# Altium PCB SLT_4U_V100.PcbDoc (part 6 of 6)
Units mm, origin at the board's own origin, x right, y up, seen from the top; angles counter-clockwise.
Board outline 180 x 80 mm, 5 copper layers (Top Layer, Mid-Layer 1, Mid-Layer 2, Mid-Layer 4, Bottom Layer); 1167 components, 840 nets, 3922 pads, 254 vias.
Unrouted connection lines stored in the file: 1943.
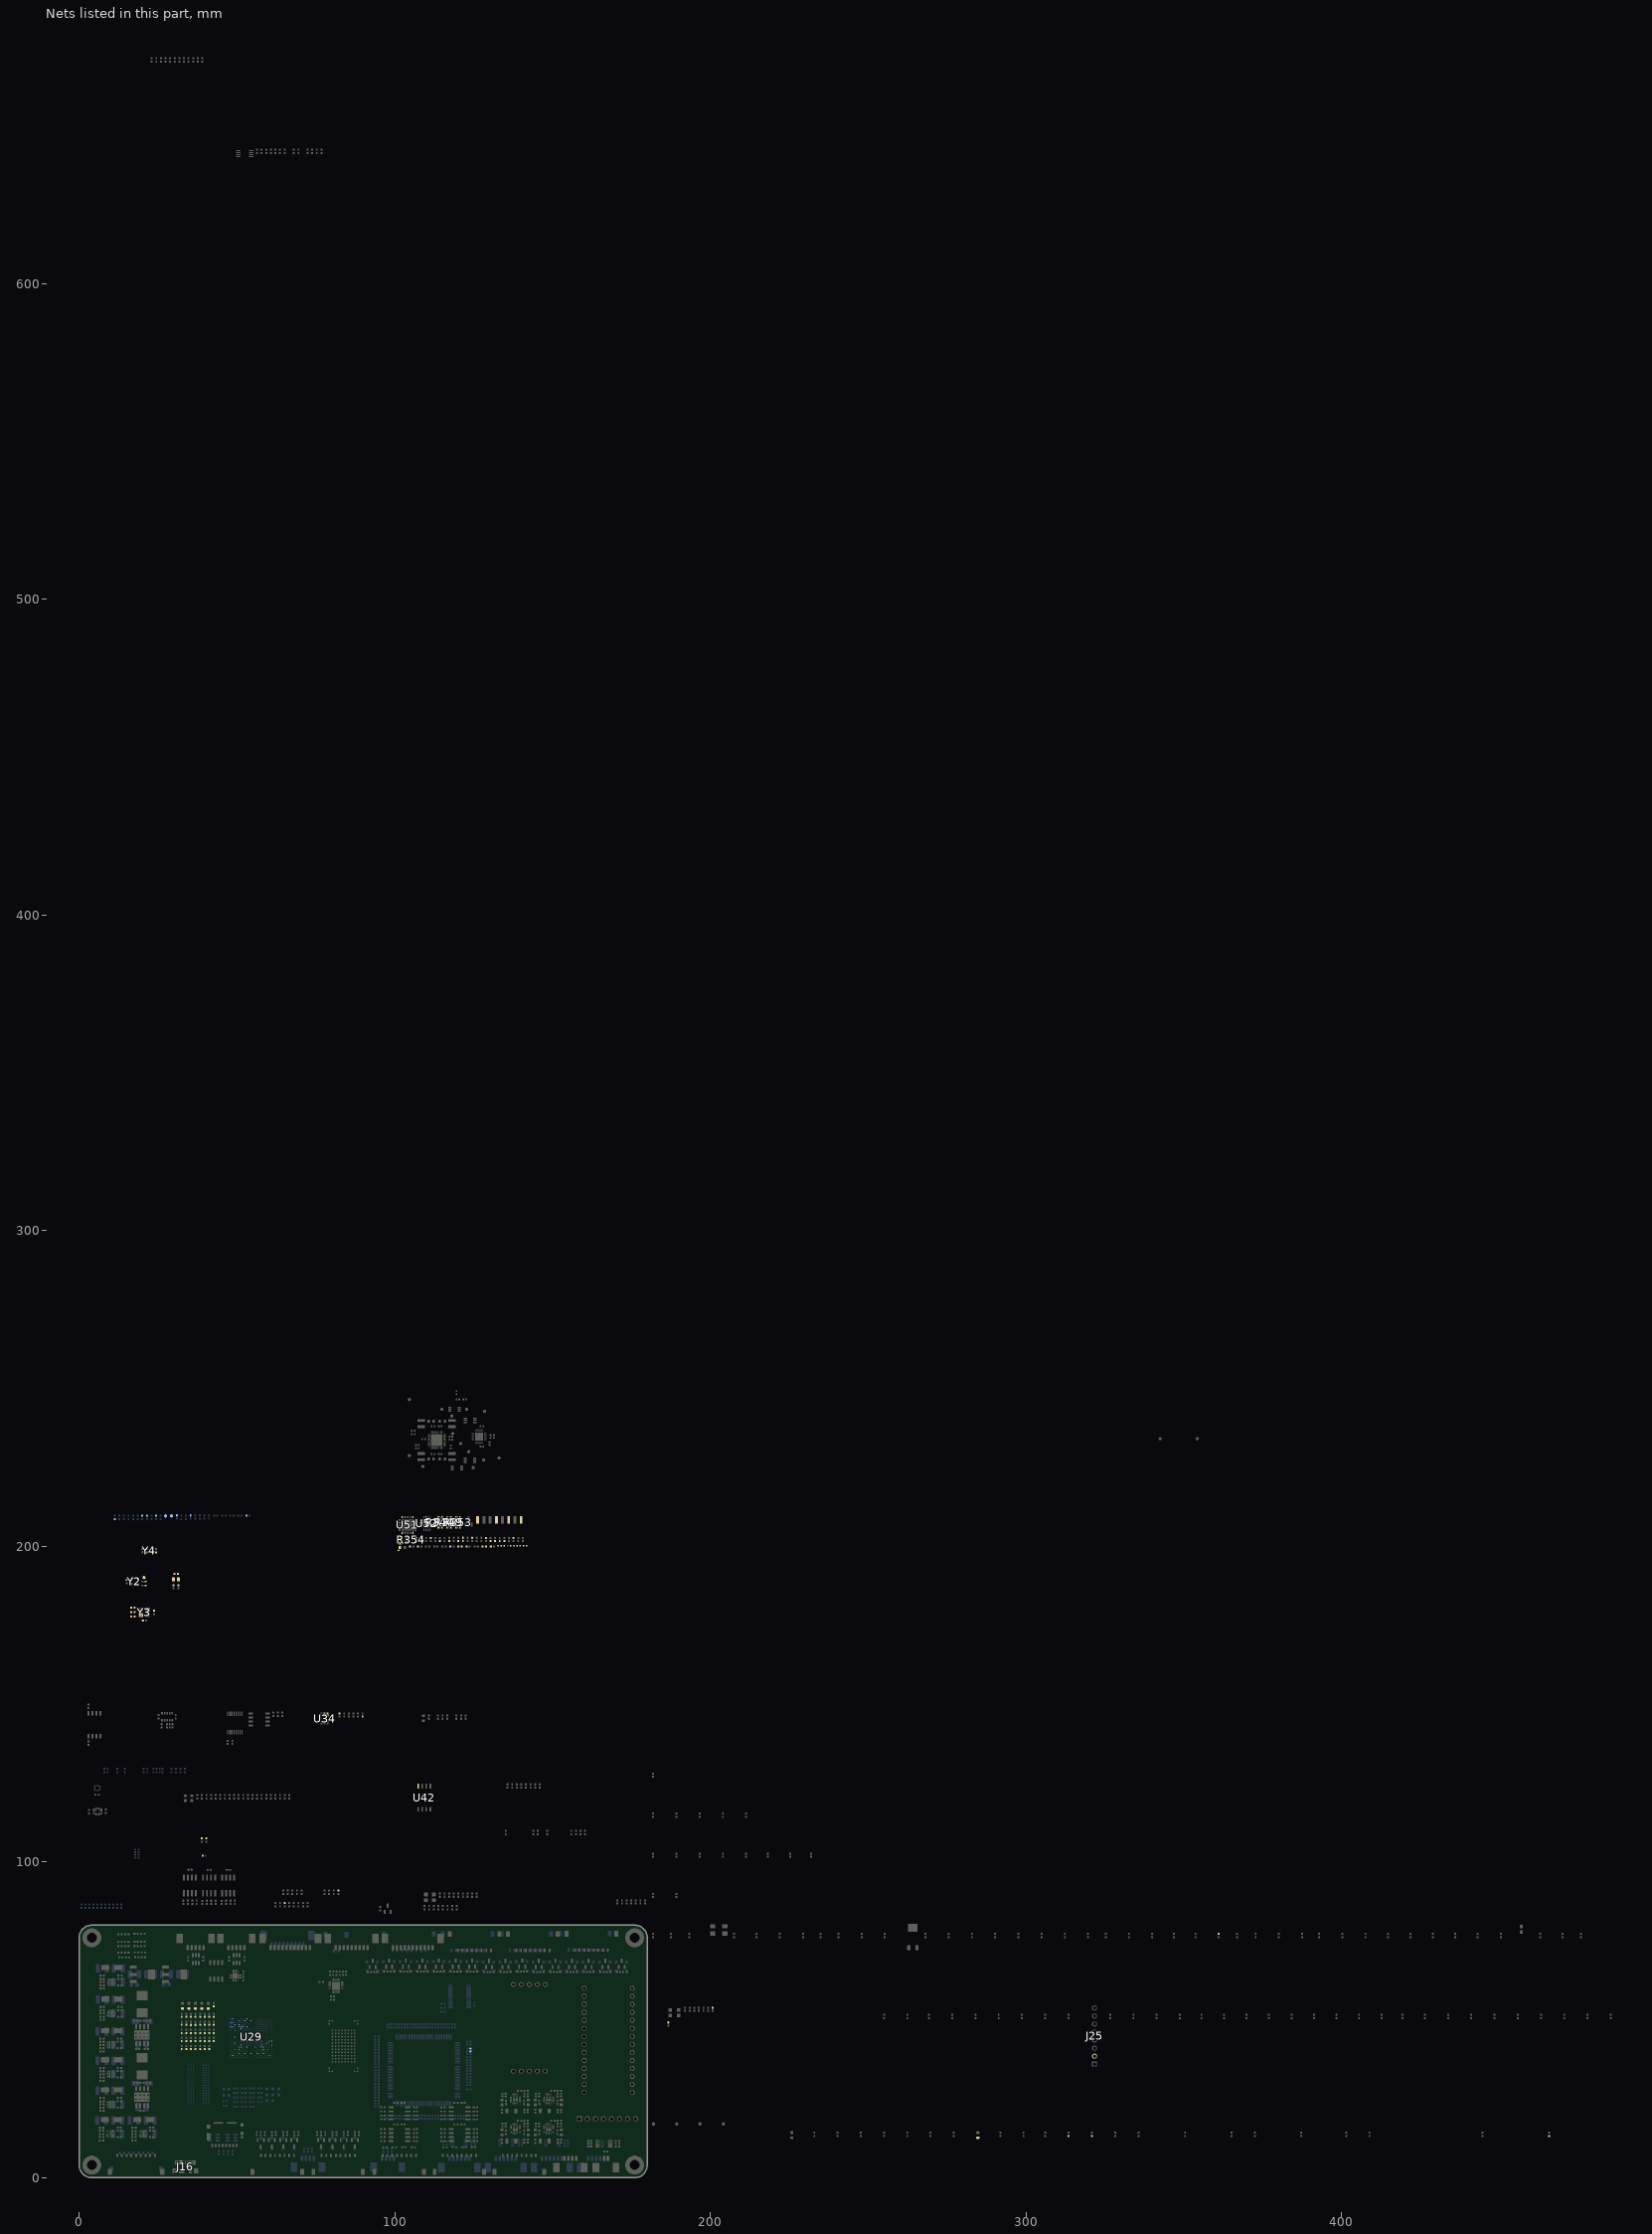
[diagram p6: the nets of this part, all layers, seen from the top]

## Via types
v1: diameter 0.4, hole 0.2, Top Layer to Bottom Layer, 235 vias
v2: diameter 0.4, hole 0.2, Top Layer to Bottom Layer, tented both sides, 18 vias
v3: diameter 0.35, hole 0.15, Top Layer to Bottom Layer, 1 vias

## Nets (pads, with @x,y where several pads share a name; then routed paths per layer and width w, separated by ;. In a path a pad name is that pad's centre, name@x,y a point inside that pad or via, vN(x,y) a via of type N, cw(c..) or ccw(c..) an arc to the next point about the centre after c; other vN are vias at no path point) (continued)
USBB_N: R304.2 U29.B4
USBB_P: R305.2 U29.A4
USBC_N: R308.2 U29.B6
USBC_P: R309.2 U29.A6
VDD_1V15_OUT3: C290.2 L9.2 R344.1 TP9.0 U51.25
VDD_1V15_OUT4: C292.2 L10.2 R349.1 TP11.0 U51.32
VDD_1V35: C288.2 L8.2 R354.1 TP7.0 U51.16
VDD_3V3: C191.2 C267.2 C279.2 C282.2 C283.1 C284.1 C285.1 C286.1 J25.2 L7.2 R302.2 R329.1 R330.1 R336.1 R337.1 R340.2 R342.2 R350.1 R353.1 R390.2 R393.2 R455.2 R460.2 R534.2 R535.2 TP6.0 U42.8 U51.9 U52.2 U52.15 Y2.4 Y4.1 Y4.4
VDD_3V3_MPU: C235.1 C236.1 C237.1 C238.1 C239.1 C242.1 C243.1 C297.1 C298.1 R351.1 R352.1 R353.2 TP14.0 U29.C14 U29.C17 U29.F13 U29.H19 U29.N16 U29.T13 U29.W14
VDDANA: C247.2 C269.1 C270.1 C271.1 C277.1 C278.1 U29.E5 U29.E6 U29.G6 U29.J6 U29.T15 U29.T16
VDDBU: C275.1 R306.2 R339.2 U29.P11
VDDCORE: C244.1 C245.1 C246.1 C248.1 C249.1 C250.1 C251.1 C252.1 C253.1 C254.1 C255.1 C256.1 C257.1 C258.1 C259.1 C260.1 R344.2 TP8.0 U29.F6 U29.F9 U29.F15 U29.J9 U29.J13 U29.L3 U29.L19 U29.N13 U29.P19 U29.U16 U29.U17 U29.U19 U29.W17 U29.Y20
VDDCPU: C150.1 C151.1 C152.1 C232.1 C233.1 C234.1 R349.2 TP10.0 U29.B20 U29.E16 U29.E17 U29.E19 U29.F16
VDDIN33: C273.1 C274.1 R351.2 U29.H3
VDDIODDR: C329.1 C333.1 R354.2 R540.1 R542.1 TP16.0
VDDSDMMC0: C240.1 TP3.0 U29.J16
VDDSDMMC1: C241.1 TP4.0 U29.C11
VDDUTMII: C261.1 C262.1 C263.1 C264.1 C266.1 C268.1 R352.2 U29.B2 U29.C5 U29.C8 U29.E3 U29.F7
VLDO1: C295.1 TP12.0 U51.19
VLDO2: C296.1 TP13.0 U51.21
VUSB: J16.1 JP2.2
WD_DONE: R65.1 U34.4
WD_nRESET: R62.2 R402.2 R408.1
WD_WAKE: R67.1 U34.5
WKUP: R339.1 U29.AA15 U51.7
XIN: R322.2 R325.2 TP5.0 U29.J2
XIN32: C265.1 R324.1 R326.2 U29.Y13 Y1.2
XIN_24M: C276.1 R325.1 R327.2 Y3.3
XOUT: R323.2 R328.2 U29.J1
XOUT32: C272.1 R324.2 U29.AA13 Y1.1
XOUT_24M: C280.1 R327.1 R328.1 Y3.1
pads on no net: C1_1.1 C1_1.2 C2_1.1 C2_1.2 C5_1.1 C5_1.2 C6_1.1 C6_1.2 C11_1.1 C11_1.2 C12_1.1 C12_1.2 C15_1.1 C15_1.2 C16_1.1 C16_1.2 C17_1.1 C17_1.2 C18_1.1 C18_1.2 C19_1.1 C19_1.2 C20_1.1 C20_1.2 C25_1.1 C25_1.2 C27_1.1 C27_1.2 C131_1.1 C131_1.2 C222.1 C222.2 C224.1 C224.2 J3.1 J3.7 J13.6 J14.6 J16.4 J17.14 J17.15 J25.1 J27.6 J28.6 L1_1.1 L1_1.2 L2_1.1 L2_1.2 L3_1.1 L3_1.2 L4_1.1 L4_1.2 R3_1.1 R3_1.2 R4_1.1 R4_1.2 R5_1.1 R5_1.2 R6_1.1 R6_1.2 R14_1.1 R14_1.2 R15_1.1 R15_1.2 R16_1.1 R16_1.2 R19_1.1 R19_1.2 R19_1.3 R19_1.4 R20_1.1 R20_1.2 R20_1.3 R20_1.4 R21_1.1 R21_1.2 R21_1.3 R21_1.4 R22_1.1 R22_1.2 R22_1.3 R22_1.4 R41.2 R118_1.1 R118_1.2 R120_1.1 R120_1.2 R280.1 R280.2 R284.1 R284.2 TP1_1.1 TP3_1.1 TP4_1.1 TP5_1.1 TP6_1.1 TP7_1.1 TP8_1.1 TP9_1.1 TP10_1.1 TP11_1.1 TP12_1.1 TP13_1.1 TP15.0 TP28_1.1 U1_1.1 U1_1.2 U1_1.3 U1_1.4 U1_1.5 U1_1.6 U1_1.7 U1_1.8 U1_1.9 U1_1.10 U1_1.11 U1_1.12 U1_1.13 U1_1.14 U1_1.15 U1_1.16 U1_1.17 U1_1.18 U1_1.19 U1_1.20 U1_1.21 U1_1.22 U1_1.23 U1_1.24 U1_1.25 U1_1.26 U1_1.27 U1_1.28 U1_1.29 U1_1.30 U1_1.31 U1_1.32 U1_1.33 U2.2 U2.3 U2.5 U3.136 U3.137 U3_1.1 U3_1.2 U3_1.3 U3_1.4 U3_1.5 U3_1.6 U3_1.7 U3_1.8 U3_1.9 U3_1.10 U3_1.11 U3_1.12 U3_1.13 U3_1.14 U3_1.15 U3_1.16 U3_1.17 U4.7 U4.8 U4.9 U4.10 U4.16 U5.2 U5.3 U10.10 U10.12 U10.13 U16.23 U16.24 U16.25 U16.26 U21.4 U22.1 U23.A1 U23.A2 U23.A9 U23.A10 U23.B1 U23.B10 U23.D2 U23.D3 U23.D4 U23.D5 U23.D6 U23.D7 U23.D8 U23.D9 U23.E2 U23.E3 U23.E4@82.264,45.688 U23.E5 U23.E6 U23.E7 U23.E8 U23.E9 U23.F2@80.264,44.688 U23.F3@81.264,44.688 U23.F4@82.264,44.688 U23.F5@83.264,44.688 U23.F6@84.264,44.688 U23.F7@85.264,44.688 U23.F8@86.264,44.688 U23.F9@87.264,44.688 U23.G2@80.264,43.688 U23.G3@81.264,43.688 U23.G4@82.264,43.688 U23.G5@83.264,43.688 U23.G6@84.264,43.688 U23.G7@85.264,43.688 U23.G8@86.264,43.688 U23.G9@87.264,43.688 U23.H2@80.264,42.688 U23.H3@81.264,42.688 U23.H4 U23.H5 U23.H6 U23.H7 U23.H8@86.264,42.688 U23.H9@87.264,42.688 U23.J2 U23.J3 U23.J4 U23.J5@83.264,41.688 U23.J6 U23.J7 U23.J8 U23.J9 U23.K2@80.264,40.688 U23.K3@81.264,40.688 U23.K4 U23.K5@83.264,40.688 U23.K6 U23.K7 U23.K8@86.264,40.688 U23.K9@87.264,40.688 U23.L2@80.264,39.688 U23.L3@81.264,39.688 U23.L4@82.264,39.688 U23.L5 U23.L6 U23.L7@85.264,39.688 U23.L8@86.264,39.688 U23.L9@87.264,39.688 U23.M2 U23.M3 U23.M4@82.264,38.688 U23.M5@83.264,38.688 U23.M6 U23.M7@85.264,38.688 U23.M8 U23.M9 U23.N2@80.264,37.688 U23.N3@81.264,37.688 U23.N4 U23.N5 U23.N6 U23.N7 U23.N8@86.264,37.688 U23.N9@87.264,37.688 U23.P2@80.264,36.688 U23.P3@81.264,36.688 U23.P4 U23.P5@83.264,36.688 U23.P6@84.264,36.688 U23.P7 U23.P8@86.264,36.688 U23.P9@87.264,36.688 U23.T1 U23.T10 U23.U1 U23.U2 U23.U9 U23.U10 U29.A15 U29.A16 U29.A20 U29.AA18 U29.AA19 U29.B13 U29.B15 U29.B18 U29.C2 U29.C3 U29.C4 U29.C7 U29.C18 U29.C20 U29.D2 U29.D3 U29.D4 U29.D7 U29.D16 U29.D17 U29.D21 U29.E4 U29.E8 U29.E14 U29.E18 U29.F3 U29.F4 U29.F14 U29.F18 U29.F19 U29.F21 U29.G3 U29.G4 U29.G8 U29.G9 U29.G12 U29.G14 U29.G16 U29.G19 U29.H12 U29.H15 U29.J11 U29.J14 U29.J20 U29.J21 U29.K7 U29.K8 U29.M12 U29.M13 U29.M14 U29.P9 U29.P10 U29.R13 U29.U14 U29.V15 U29.V19 U29.V20 U29.V21 U29.W11 U29.Y15 U29.Y19 U31.8 U31.10 U35.2 U35.3 U45.1 U49.2 U49.3 U49.9 U49.10 U49.11 U50.7 U50.9 U51.17 U53.J1 U53.J9 U53.L1 U53.L9
copper on no net: | length 748.1
  Top Layer w0.1: v1(106.572,230.063) 106.629,230.12 106.629,230.945 106.722,231.038
  Top Layer w0.125: 99.697,242.413 101.567,242.413 102.647,243.493 v1(102.647,245.488) ; v1(100.322,222.063) v1@100.347,222.038 ; 100.597,221.463 100.997,221.863 101.797,221.863 v1(101.922,221.738) ; 100.727,228.458 103.147,230.878 103.147,249.788 ; 100.847,222.763 101.122,222.488 102.347,222.488 102.647,222.188 102.647,221.645 ; 103.372,224.188 105.297,222.263 124.197,222.263 ; v1(104.422,224.088) 105.951,222.559 125.676,222.559 126.079,222.156 131.729,222.156 131.972,221.913 ; 104.547,224.813 106.516,222.844 125.703,222.844 126.097,223.238 132.266,223.238 132.641,222.863 ; 104.647,225.463 106.98,223.13 125.389,223.13 125.997,223.738 132.495,223.738 132.92,223.313 ; 104.872,226.713 105.072,226.913 v1(106.35,226.913) ; 104.972,226.088 107.645,223.415 125.099,223.415 125.947,224.263 132.67,224.263 133.088,223.846 ; v1(105.997,232.038) 106.722,232.038 ; 106.322,221.388 109.497,221.388 109.922,221.813 113.097,221.813 ; 110.297,221.413 112.897,221.413 ; 110.783,233.406 108.279,233.406 107.822,233.863 104.572,233.863 104.272,234.163 104.272,240.163 109.172,245.063 122.797,245.063 123.847,246.113 125.447,246.113 126.222,246.888 126.222,248.188 125.797,248.613 ; 110.797,232.913 108.097,232.913 107.747,233.263 104.197,233.263 103.747,233.713 103.747,240.413 108.847,245.513 122.622,245.513 124.133,247.024 125.411,247.024 v1(125.422,247.013) ; 117.322,234.738 117.322,234.813 ; 118.072,241.288 118.072,239.963 118.172,239.863 ; v1(118.547,248.213) 119.547,248.213 120.885,248.213 121.047,248.051 121.047,247.913 ; 119.547,249.113 119.922,248.738 121.697,248.738 ; v1(120.825,221.513) 123.372,221.513 ; v1(125.097,228.995) 125.104,228.988 130.797,228.988 132.584,227.201 133.073,227.201 ; v1(125.222,225.663) 125.272,225.663 125.672,226.063 130.897,226.063 131.097,226.263 v1(132.729,226.263) ; v1(125.439,222.121) 125.947,221.613 130.147,221.613 ; v1(126.172,225.588) 126.372,225.388 132.897,225.388 133.272,225.013 ; v1(127.022,228.563) 130.697,228.563 132.522,226.738 132.947,226.738 133.472,226.213 133.472,225.688 v1@133.522,225.638 ; 127.047,236.763 127.047,237.988 127.122,238.063 ; v1(127.197,245.288) 128.672,245.288 130.597,243.363 130.597,236.763 129.572,235.738 128.722,235.738 ; 127.697,232.763 127.697,232.213 127.935,231.975 127.935,231.675 128.072,231.538 ; 127.697,236.763 v1(128.497,236.763) ; 128.172,246.713 131.347,243.538 131.347,236.838 132.022,236.163 132.022,233.588 131.422,232.988 130.047,232.988 130.047,233.513 129.772,233.788 128.722,233.788 ; 129.172,249.238 129.647,248.763 132.222,248.763 132.655,249.196 ; 129.672,249.638 130.122,249.188 132.072,249.188 132.472,249.588 ; 132.797,230.363 132.797,248.463 133.097,248.763 ; 133.197,230.563 133.197,247.263 133.297,247.363 ; 133.297,247.863 133.197,247.963 133.197,248.263 133.297,248.363 ; 133.697,246.963 133.597,246.863 133.597,230.763 133.797,230.563
  Top Layer w0.15: v1(105.197,237.638) 105.722,237.638 106.247,237.113 106.247,236.638 106.297,236.588 106.297,236.563 106.647,236.213 109.365,236.213 110.172,235.406 110.783,235.406 ; 107.622,231.038 109.222,231.038 110.097,231.913 110.775,231.913 110.783,231.906 ; 110.775,233.913 110.783,233.906 ; 110.783,232.406 109.265,232.406 108.897,232.038 107.622,232.038 107.622,232.013 107.147,231.538 106.347,231.538 106.047,231.238 106.047,228.313 106.797,227.563 106.797,225.488 108.572,223.713 124.797,223.713 125.897,224.813 132.845,224.813 133.22,224.438 ; 115.808,232.406 116.454,232.406 v1(116.622,232.238) ; 115.808,234.406 116.19,234.406 v1(117.356,235.572) ; 115.808,234.906 116.215,234.906 116.647,235.338 v1(116.647,235.463) ; 115.808,235.406 115.808,235.699 116.043,235.934 116.268,235.934 116.847,236.513 120.747,236.513 121.072,236.838 121.697,236.838 122.472,236.063 122.472,235.513 v1(123.122,234.863) ; 116.017,227.662 116.043,227.688
  Top Layer w0.2: 102.147,227.188 102.822,227.863 102.822,228.863 104.522,230.563 104.522,231.988 105.372,232.838 107.572,232.838 107.822,232.588 108.072,232.588 108.172,232.488 v1(108.497,232.488) ; v1(104.847,234.313) 104.872,234.338 105.646,234.338 106.296,234.988 ; 106.297,235.588 106.296,235.587 106.296,234.988 ; 110.783,234.906 110.104,234.906 109.772,235.238 107.801,235.238 107.551,234.988 106.296,234.988 ; 117.447,243.413 118.597,243.413 118.747,243.263 v1@118.747,242.988 ; 118.247,224.813 119.547,224.813 119.697,224.963 119.697,225.829 119.872,226.004 119.872,228.629 122.447,231.204 122.447,233.163 123.597,234.313 124.372,234.313 124.497,234.438 124.722,234.438 ; v1@119.147,242.988 119.147,243.263 119.297,243.413 120.447,243.413 ; v1(120.147,237.588) 120.197,237.638 121.572,237.638 123.997,235.213 124.372,235.213 124.497,235.088 124.722,235.088 ; v1(120.147,238.088) 120.197,238.038 121.738,238.038 124.163,235.613 124.372,235.613 124.497,235.738 124.722,235.738 ; 121.247,224.813 120.247,224.813 120.097,224.963 120.097,225.663 120.272,225.838 120.272,228.463 122.847,231.038 122.847,232.997 123.763,233.913 124.372,233.913 124.497,233.788 124.722,233.788 ; 122.322,227.313 123.472,227.313 123.622,227.463 123.622,228.854 125.872,231.104 125.872,232.413 125.747,232.538 125.747,232.763 ; 122.397,239.888 123.572,239.888 123.734,239.726 123.734,238.56 124.256,238.038 125.581,238.038 125.872,237.747 125.872,237.113 125.747,236.988 125.747,236.763 ; 125.322,227.313 124.172,227.313 124.022,227.463 124.022,228.688 126.272,230.938 126.272,232.413 126.397,232.538 126.397,232.763 ; 125.397,239.888 124.297,239.888 124.134,239.725 124.134,238.726 124.422,238.438 125.747,238.438 126.272,237.913 126.272,237.113 126.397,236.988 126.397,236.763 ; v1(125.797,229.378) 131.987,229.378 v1(131.997,229.388) ; v1(126.427,222.713) 131.905,222.713 132.188,222.43 v1(132.242,222.43) ; 130.422,249.638 131.922,249.638
  Top Layer w0.3: 109.622,233.913 110.775,233.913 ; 110.572,227.688 110.297,227.963 110.297,230.388 111.065,231.156 111.558,231.156 ; 110.722,239.613 110.537,239.613 110.272,239.348 110.272,236.923 111.04,236.156 111.533,236.156 ; 110.797,234.413 112.547,234.413 ; v1@111.097,237.473 112.033,236.537 112.033,236.156 ; v1@111.122,229.838 112.058,230.774 112.058,231.156 ; 114.533,236.156 114.533,236.537 v1@115.468,237.473 ; 114.558,231.156 114.558,230.774 v1@115.493,229.838 ; 115.033,236.156 115.526,236.156 116.293,236.923 116.293,239.348 116.018,239.623 ; 115.058,231.156 115.551,231.156 116.318,230.388 116.318,227.963 116.043,227.688 ; 115.808,232.906 116.854,232.906 ; 115.808,233.406 116.515,233.406 116.847,233.738 117.322,233.738 ; 115.808,233.906 116.34,233.906 117.172,234.738 117.322,234.738 ; 117.322,234.813 118.247,235.738 118.372,235.738
  Top Layer w0.35: 128.722,234.438 v1(129.646,234.438) 129.96,234.438 130.06,234.338 131.397,234.338 131.422,234.313 ; 128.728,235.082 v1(129.641,235.082) 129.797,235.238 130.397,235.238 131.397,235.238 131.437,235.278 131.437,235.876 v1(131.447,235.885)
  Top Layer w0.4: 104.622,228.713 104.647,228.738 v1(105.522,228.738) ; 104.622,246.488 104.622,248.888 v1(104.722,248.988) 106.097,248.988 ; v1(105.397,234.938) 105.397,236.588 ; v1(108.197,234.438) 108.722,233.913 ; v1(109.047,234.588) v1(109.622,234.588) 109.622,233.913 ; 109.297,248.988 109.972,248.313 111.597,248.313 ; 112.547,234.413 v2(113.297,233.663) ; 113.322,247.613 112.297,247.613 111.597,248.313 ; 113.322,248.563 v1(114.522,248.563) ; 113.322,249.513 112.69,249.513 111.847,248.67 111.847,248.513 111.647,248.313 111.597,248.313 ; 117.322,233.738 117.322,233.438 v1(117.672,233.088) ; 117.772,231.063 v1(118.472,231.063) ; 118.222,233.738 v1(118.897,233.738) ; 118.222,234.738 v1(118.897,234.738) ; v1(118.922,246.513) 119.522,246.513 ; 120.422,246.513 120.422,246.738 121.047,247.363 121.047,247.913 ; v1(121.122,246.163) 121.472,246.513 121.672,246.513 121.672,247.888 121.697,247.913 121.697,248.738 122.347,249.388 ; 122.322,226.713 v1(121.472,226.713) 121.397,226.788 v1(121.397,227.313) 121.397,227.813 v1(121.497,227.913) 122.322,227.913 v1(122.322,228.463) 122.335,228.475 122.335,228.85 123.447,229.963 ; 122.347,247.913 122.347,247.251 v1(122.478,247.119) 122.478,247.045 122.572,246.951 122.572,246.513 ; v1(123.559,248.801) 123.559,249.438 ; v1(126.322,244.538) 126.322,245.588 126.997,246.263 126.997,249.588 ; 127.047,232.763 127.047,232.151 v1(127.109,232.088) 127.109,231.6 127.172,231.538 127.16,231.525 127.16,230.901 v1(127.147,230.888) ; 128.022,238.063 v1(128.022,238.688) ; 128.472,242.813 128.947,242.338 v1(129.298,242.338) ; v1(129.322,231.538) 129.872,232.088 130.047,232.088 ; 133.072,228.013 133.072,227.913 133.347,227.638
  Top Layer w0.5: 116.854,232.906 117.797,231.963 119.447,231.963 119.984,232.501 ; 119.997,232.538 120.897,232.538 ; v1(121.597,235.738) v1(121.597,236.213) ; 125.322,226.713 126.572,226.713 ; 125.322,227.913 126.622,227.913 ; 125.397,239.288 126.372,239.288 ; 125.397,240.488 126.397,240.488
  Top Layer w0.6: v1@111.097,237.473 v1(111.097,237.598) v1(111.097,238.073) ; v1@111.097,238.423 v1(111.097,238.073) ; v1@111.122,228.888 v1(111.122,229.238) ; v1@111.122,229.838 v1(111.122,229.713) v1(111.122,229.238) ; 111.697,238.073 v1(111.097,238.073) ; 111.722,229.238 v1(111.122,229.238) ; 114.868,238.073 v1(115.468,238.073) ; 114.893,229.238 v1(115.493,229.238) ; v1@115.468,237.473 v1(115.468,237.598) v1(115.468,238.073) ; v1@115.468,238.423 v1(115.468,238.073) ; v1@115.493,228.888 v1(115.493,229.238) ; v1@115.493,229.838 v1(115.493,229.713) v1(115.493,229.238) ; v1(123.797,224.763) 123.947,224.913 124.822,224.913
  Top Layer w0.8: 119.997,232.538 119.997,234.588 121.372,235.963 v1(121.597,235.738)
  Mid-Layer 1 w0.102: 90,0.762 90,79.248
  other v1: 114.147,221.513 118.447,221.513 131.422,221.538 101.447,223.213 102.147,223.213 101.122,223.638 101.797,223.638 102.472,223.638 124.597,224.113 122.772,224.763 123.297,224.763 122.747,225.338 123.272,225.338 123.797,225.338 133.482,225.647 109.697,226.013 110.222,226.013 110.747,226.013 109.722,226.513 110.247,226.513 110.747,226.513 115.847,226.513 116.347,226.513 116.872,226.513 117.397,226.513 117.897,226.513 112.272,226.663 112.772,226.663 113.297,226.663 113.822,226.663 114.322,226.663 129.497,226.938 130.047,226.938 110.747,226.988 110.247,227.013 113.297,227.313 129.772,227.388 130.347,227.388 129.497,227.838 130.047,227.838 105.272,227.913 113.297,227.938 113.297,228.538 111.122,228.788 115.493,228.788 113.297,229.163 113.297,229.788 112.072,229.988 112.547,229.988 114.068,229.988 114.543,229.988 107.597,230.238 108.172,230.238 108.747,230.238 109.347,230.238 117.268,230.238 117.868,230.238 118.443,230.238 119.018,230.238 113.297,230.413 112.547,230.438 114.068,230.438 125.222,232.788 126.722,234.763 121.147,235.963 112.522,236.873 114.043,236.873 113.293,236.898 107.572,237.073 108.147,237.073 108.722,237.073 109.322,237.073 117.243,237.073 117.843,237.073 118.418,237.073 118.993,237.073 112.047,237.323 112.522,237.323 114.043,237.323 114.518,237.323 113.293,237.523 113.293,238.148 111.097,238.523 115.468,238.523 113.293,238.773 113.293,239.373 113.293,239.998 112.268,240.648 112.768,240.648 113.293,240.648 113.818,240.648 114.318,240.648 129.522,240.938 129.522,241.438 129.297,241.888 129.772,241.888 129.772,242.338 118.697,242.988 119.197,242.988 124.772,244.213 125.297,244.213 124.772,244.713 125.297,244.713 124.772,245.213 125.297,245.213 121.672,247.113 120.497,249.163 121.047,249.163
  other v2: 112.097,232.463 113.297,232.463 114.497,232.463 112.097,233.663 114.497,233.663 112.097,234.863 113.297,234.863 114.497,234.863
  other v3: 132.397,232.963

## Polygon pours and split planes (outlines as drawn)
no net on Top Layer "full" (solid, remove dead copper, pour order 90): 107.197,239.188 111.122,239.188 111.122,241.375 112.31,242.563 117.947,242.563 117.947,244.263 108.829,244.263 107.197,242.631
no net on Top Layer "full" (solid, remove dead copper, pour order 89): 107.222,228.138 111.122,228.138 111.122,225.663 118.747,225.663 118.747,223.963 109.122,223.963 107.222,225.863
no net on Top Layer "full" (solid, remove dead copper, pour order 88): 122.897,239.038 115.472,239.038 115.472,241.148 122.897,241.148
no net on Top Layer "full" (solid, remove dead copper, pour order 87): 112.922,232.738 113.697,232.738 113.697,231.663 113.697,229.538 114.247,229.538 114.247,228.438 114.672,228.438 114.672,226.413 111.922,226.413 111.922,228.438 112.322,228.438 112.322,229.538 112.922,229.538
no net on Top Layer "full" (solid, remove dead copper, pour order 86): 113.668,234.573 112.894,234.573 112.893,235.648 112.893,237.763 112.343,237.763 112.343,238.873 111.924,238.873 111.924,240.898 114.672,240.898 114.672,238.873 114.24,238.873 114.24,237.763 113.668,237.763
no net on Top Layer "full" (solid, remove dead copper, pour order 85): 119.947,244.263 125.622,244.263 125.622,242.563 119.947,242.563
no net on Top Layer "full" (solid, remove dead copper, pour order 84): 119.393,228.138 115.472,228.138 115.472,226.163 119.393,226.163
no net on Top Layer "full" (solid, remove dead copper, pour order 83): 120.747,225.663 124.222,225.663 124.222,223.963 120.747,223.963
no net on Top Layer "full" (solid, remove dead copper, pour order 82): 123.622,242.563 123.622,245.438 125.622,245.438 125.622,242.563
no net on Top Layer "full" (solid, remove dead copper, pour order 81): 119.368,236.823 116.968,236.823 116.968,238.323 119.368,238.323
no net on Top Layer "full" (solid, remove dead copper, pour order 80): 107.222,230.488 109.622,230.488 109.622,228.988 107.222,228.988
no net on Top Layer "full" (solid, remove dead copper, pour order 79): 116.972,230.488 119.372,230.488 119.372,228.988 116.972,228.988
no net on Top Layer "full" (solid, remove dead copper, pour order 78): 109.618,236.863 107.218,236.863 107.218,238.323 109.618,238.323
no net on Top Layer "full" (solid, remove dead copper, pour order 77): 113.893,236.198 113.893,236.723 113.843,236.773 113.843,237.448 113.918,237.523 114.618,237.523 114.718,237.423 114.718,237.223 114.168,236.673 114.168,236.198
no net on Top Layer "full" (solid, remove dead copper, pour order 76): 113.918,231.113 113.918,230.588 113.868,230.538 113.868,229.863 113.943,229.788 114.643,229.788 114.743,229.888 114.743,230.088 114.193,230.638 114.193,231.113
no net on Top Layer "full" (solid, remove dead copper, pour order 75): 112.672,236.198 112.672,236.723 112.722,236.773 112.722,237.448 112.647,237.523 111.947,237.523 111.847,237.423 111.847,237.223 112.397,236.673 112.397,236.198
no net on Top Layer "full" (solid, remove dead copper, pour order 74): 112.697,231.113 112.697,230.588 112.747,230.538 112.747,229.863 112.672,229.788 111.972,229.788 111.872,229.888 111.872,230.088 112.422,230.638 112.422,231.113
EXP_12V on Top Layer "EXP_12V_L01_P043" (solid, pour order 43): 6.497,19.832 9.926,19.832 cw(c9.926,19.44) 10.318,19.44 10.318,12.573 9.979,12.573 9.979,15.802 ccw(c8.89,15.802) 8.89,16.891 6.484,16.891 cw(c6.484,17.279) 6.096,17.279 6.096,19.431 cw(c6.497,19.431)
GND on Top Layer "GND_L01_P056" (solid, pour order 56): 19.67,23.622 18.942,23.622 ccw(c18.942,23.476) 18.796,23.476 18.796,21.844 17.907,21.844 ccw(c17.907,21.695) 17.758,21.695 17.758,20.977 ccw(c17.907,20.977) 17.907,20.828 19.558,20.828 ccw(c19.558,21.082) 19.812,21.082 19.812,23.48 ccw(c19.67,23.48)
5V_MCU on Top Layer "5V_MCU_L01_P053" (solid, pour order 53): 8.763,35.052 8.763,34.909 9.615,34.057 9.615,31.346 9.062,31.346 ccw(c9.062,31.041) 8.846,31.257 8.509,30.919 8.509,30.81 ccw(c8.585,30.81) 8.585,30.734 9.779,30.734 ccw(c9.779,30.904) 9.949,30.904 9.949,34.882 ccw(c9.525,34.882) 9.525,35.306 9.017,35.306 ccw(c9.017,35.052)
5V_HD4 on Top Layer "5V_HD4_L01_P049" (solid, pour order 49): 6.708,58.027 10.137,58.027 cw(c10.137,57.635) 10.529,57.635 10.529,50.768 10.19,50.768 10.19,53.997 ccw(c9.101,53.997) 9.101,55.086 6.695,55.086 cw(c6.695,55.474) 6.307,55.474 6.307,57.626 cw(c6.708,57.626)
EXP_12V on Top Layer "EXP_12V_L01_P055" (solid, pour order 55): 20.208,23.622 20.936,23.622 cw(c20.936,23.476) 21.082,23.476 21.082,21.844 21.971,21.844 cw(c21.971,21.695) 22.12,21.695 22.12,20.977 cw(c21.971,20.977) 21.971,20.828 20.32,20.828 cw(c20.32,21.082) 20.066,21.082 20.066,23.48 cw(c20.208,23.48)
EXP_12V on Top Layer "EXP_12V_L01_P039" (solid, pour order 39): 8.76,25.527 8.76,25.384 9.612,24.532 9.612,21.821 9.059,21.821 ccw(c9.059,21.516) 8.843,21.732 8.506,21.394 8.506,21.285 ccw(c8.582,21.285) 8.582,21.209 9.776,21.209 ccw(c9.776,21.379) 9.946,21.379 9.946,25.357 ccw(c9.522,25.357) 9.522,25.781 9.014,25.781 ccw(c9.014,25.527)
EXP_12V on Top Layer "EXP_12V_L01_P028" (solid, pour order 28): 18.926,16.129 18.926,15.986 19.778,15.134 19.778,12.423 19.225,12.423 ccw(c19.225,12.118) 19.009,12.334 18.672,11.996 18.672,11.887 ccw(c18.748,11.887) 18.748,11.811 19.942,11.811 ccw(c19.942,11.981) 20.112,11.981 20.112,15.959 ccw(c19.688,15.959) 19.688,16.383 19.18,16.383 ccw(c19.18,16.129)
5V_SOM on Top Layer "5V_SOM_L01_P018" (solid, pour order 18): 6.624,38.755 10.053,38.755 cw(c10.053,38.363) 10.445,38.363 10.445,31.496 10.106,31.496 10.106,34.725 ccw(c9.017,34.725) 9.017,35.814 6.611,35.814 cw(c6.611,36.202) 6.223,36.202 6.223,38.354 cw(c6.624,38.354)
5V_PERI on Top Layer "5V_PERI_L01_P052" (solid, pour order 52): 8.763,44.323 8.763,44.18 9.615,43.328 9.615,40.617 9.062,40.617 ccw(c9.062,40.312) 8.846,40.528 8.509,40.19 8.509,40.081 ccw(c8.585,40.081) 8.585,40.005 9.779,40.005 ccw(c9.779,40.175) 9.949,40.175 9.949,44.153 ccw(c9.525,44.153) 9.525,44.577 9.017,44.577 ccw(c9.017,44.323)
5V_PERI on Top Layer "5V_PERI_L01_P051" (solid, pour order 51): 8.847,54.324 8.847,54.181 9.699,53.328 9.699,50.618 9.146,50.618 ccw(c9.146,50.313) 8.93,50.528 8.593,50.191 8.593,50.082 ccw(c8.669,50.082) 8.669,50.006 9.863,50.006 ccw(c9.863,50.175) 10.032,50.175 10.032,54.154 ccw(c9.609,54.154) 9.609,54.578 9.101,54.578 ccw(c9.101,54.324)
NetC175_2 on Top Layer "NETC175_2_L01_P027" (solid, pour order 27): 8.862,64.254 8.862,64.111 9.714,63.259 9.714,60.548 9.161,60.548 ccw(c9.161,60.243) 8.945,60.459 8.608,60.121 8.608,60.012 ccw(c8.684,60.012) 8.684,59.936 9.878,59.936 ccw(c9.878,60.106) 10.047,60.106 10.047,64.084 ccw(c9.624,64.084) 9.624,64.508 9.116,64.508 ccw(c9.116,64.254)
LP_12V on Top Layer "LP_12V_L01_P047" (solid, pour order 47): 6.621,29.23 10.05,29.23 cw(c10.05,28.838) 10.442,28.838 10.442,21.971 10.103,21.971 10.103,25.2 ccw(c9.014,25.2) 9.014,26.289 6.608,26.289 cw(c6.608,26.677) 6.22,26.677 6.22,28.829 cw(c6.621,28.829)
12V_HEATER on Top Layer "12V_HEATER_L01_P054" (solid, pour order 54): 16.787,19.832 20.216,19.832 cw(c20.216,19.44) 20.608,19.44 20.608,12.573 20.269,12.573 20.269,15.802 ccw(c19.18,15.802) 19.18,16.891 16.774,16.891 cw(c16.774,17.279) 16.386,17.279 16.386,19.431 cw(c16.787,19.431)
5V_TEC on Top Layer "5V_TEC_L01_P048" (solid, pour order 48): 6.624,48.026 10.053,48.026 cw(c10.053,47.634) 10.445,47.634 10.445,40.767 10.106,40.767 10.106,43.996 ccw(c9.017,43.996) 9.017,45.085 6.611,45.085 cw(c6.611,45.473) 6.223,45.473 6.223,47.625 cw(c6.624,47.625)
5/12V_Solenoid on Top Layer "5/12V_SOLENOID_L01_P050" (solid, pour order 50): 6.723,67.957 10.152,67.957 cw(c10.152,67.565) 10.544,67.565 10.544,60.698 10.205,60.698 10.205,63.927 ccw(c9.116,63.927) 9.116,65.016 6.71,65.016 cw(c6.71,65.404) 6.322,65.404 6.322,67.556 cw(c6.723,67.556)
EXP_12V on Bottom Layer "EXP_12V_L05_P040" (solid, pour order 40): 7.366,20.193 11.971,20.193 cw(c11.971,19.972) 12.192,19.972 12.192,16.891 cw(c11.938,16.891) 11.938,16.637 7.366,16.637 cw(c7.366,16.891) 7.112,16.891 7.112,19.939 cw(c7.366,19.939)
IF_12V on Bottom Layer "Bottom Layer-IF_12V" (solid, pour order 42): 7.318,9.017 12.192,9.017 12.192,16.121 ccw(c11.938,16.121) 11.938,16.375 7.612,16.375 ccw(c7.612,16.081) 7.318,16.081 7.318,12.998
EXP_12V on Bottom Layer "EXP_12V_L05_P037" (solid, pour order 37): 12.316,21.463 12.316,25.527 ccw(c12.062,25.527) 12.062,25.781 8.252,25.781 ccw(c8.252,25.412) 7.883,25.412 7.883,24.511 7.883,21.494 ccw(c8.168,21.494) 8.168,21.209 12.062,21.209 ccw(c12.062,21.463)
EXP_12V on Bottom Layer "EXP_12V_L05_P035" (solid, pour order 35): 22.482,12.065 22.482,16.129 ccw(c22.228,16.129) 22.228,16.383 18.418,16.383 ccw(c18.418,16.014) 18.049,16.014 18.049,15.113 18.049,12.096 ccw(c18.334,12.096) 18.334,11.811 22.228,11.811 ccw(c22.228,12.065)
5V_SOM on Bottom Layer "5V_SOM_L05_P024" (solid, pour order 24): 7.493,39.116 12.098,39.116 cw(c12.098,38.895) 12.319,38.895 12.319,35.814 cw(c12.065,35.814) 12.065,35.56 7.493,35.56 cw(c7.493,35.814) 7.239,35.814 7.239,38.862 cw(c7.493,38.862)
5V_PERI on Bottom Layer "5V_PERI_L05_P046" (solid, pour order 46): 12.411,50.267 12.411,54.331 ccw(c12.157,54.331) 12.157,54.585 8.347,54.585 ccw(c8.347,54.215) 7.977,54.215 7.977,53.315 7.977,50.297 ccw(c8.262,50.297) 8.262,50.013 12.157,50.013 ccw(c12.157,50.267)
5V_PERI on Bottom Layer "5V_PERI_L05_P045" (solid, pour order 45): 12.327,40.266 12.327,44.33 ccw(c12.073,44.33) 12.073,44.584 8.263,44.584 ccw(c8.263,44.215) 7.894,44.215 7.894,43.314 7.894,40.297 ccw(c8.179,40.297) 8.179,40.012 12.073,40.012 ccw(c12.073,40.266)
NetC175_2 on Bottom Layer "NETC175_2_L05_P033" (solid, pour order 33): 12.418,60.19 12.418,64.254 ccw(c12.164,64.254) 12.164,64.508 8.354,64.508 ccw(c8.354,64.139) 7.985,64.139 7.985,63.238 7.985,60.221 ccw(c8.269,60.221) 8.269,59.936 12.164,59.936 ccw(c12.164,60.19)

## Keep-outs
Keep-Out Layer:
  the board outline again, w0.5

## Other copper
Top Layer:
  rectangle: 126.097,239.038 129.997,240.738
  rectangle: 126.222,226.463 130.572,228.163
  rectangle: 128.322,239.038 129.997,242.563
  rectangle: 120.797,226.463 121.672,228.163
  region net IF_12V: 9.502,12.804 9.502,9.675 ccw(c9.833,9.675) 9.833,9.344 14.101,9.344 14.101,11.426 ccw(c13.716,11.426) 13.716,11.811 9.806,11.811 9.806,12.804

## Text inside footprints (layer, text, board x,y; h text height)
U1_1: Top Assembly "1" at 111.011,235.568 h0.76 r270
U23: Top Assembly "10" at 88.899,51.378 h1.27 r90; Top Assembly "1" at 79.899,51.378 h1.27 r90; Top Assembly "U" at 75.446,33.053 h1.27; Top Assembly "A" at 75.446,49.053 h1.27; Top Overlay "10" at 88.964,50.888 h1.27 r90; Top Overlay "1" at 79.864,51.088 h1.27 r90; Top Overlay "U" at 75.764,32.888 h1.27; Top Overlay "A" at 75.664,49.188 h1.27
U29: Bottom Assembly "A1" at 48.673,51.362 h1 r90
U30: Top Component Outline "*" at 3.442,140.843 h1.27 r90
U42: Top Component Outline "*" at 107.963,117.754 h1.27 r90
U51: Top Assembly "1" at 101.729,208.659 h0.76 r270
U53: Bottom Overlay "A" at 31.47,24.258 h1.27 r180; Bottom Overlay "T" at 31.47,36.258 h1.27 r180; Bottom Overlay "1" at 35.23,21.94 h1.27 r90; Bottom Overlay "9" at 41.63,21.94 h1.27 r90; Bottom Overlay "RefDes" at 35.89,30.258 h1.27 r180; Bottom Overlay "REFDES" at 35.572,30.258 h1.27 r180; Top Overlay "A" at 32.105,24.258 h1.27 r180; Top Overlay "T" at 32.105,36.258 h1.27 r180; Top Overlay "1" at 33.96,21.94 h1.27 r270; Top Overlay "9" at 40.36,21.94 h1.27 r270; Mechanical 13 "A" at 31.47,24.258 h1.27 r180; Mechanical 13 "T" at 31.47,36.258 h1.27 r180; Mechanical 13 "1" at 35.23,21.94 h1.27 r90; Mechanical 13 "9" at 41.63,21.94 h1.27 r90; Mechanical 13 "RefDes2" at 35.572,30.258 h1.27 r180
Y2: Top Assembly "1" at 16.628,187.954 h0.4
Y4: Top Assembly "1" at 21.398,197.925 h0.4